# EAGLE board Co2 Emission_Gates (EAGLE 9.7.0)

Size 170.24 x 109.55 mm. Coordinates in mm from the lower left corner, seen from the top.
Outline: 0,0 170.24,0 170.24,109.55 0,109.55 0,0
Copper layers (1*16): Top 0.035mm / dielectric 1.5mm / Bottom 0.035mm
Design rules "default": minimum track width 6mil, minimum drill 0.35mm, track to track 6mil, track to pad 6mil, pad to pad 6mil, via to via 6mil, smd to smd 6mil, copper to edge 40mil, drill to drill 6mil, minimum pad ring 10mil, minimum via ring 8mil, stop-mask expansion 4mil, vias tented up to drill 0mil, thermal gap 10mil

## Footprints (pad centres in the part's own frame; a part is rotated, then mirrored left to right if it is on the bottom)
BATTERY-GENERIC = drill 1.118 pad 3.15 octagon: + 2.54,0; - -2.54,0
LEDRD254W60D565H860B = drill 0.981 pad 1.581: 1 -1.27,0; 2 1.27,0
LEDRD254W60D565H860B_Y = drill 0.981 pad 1.581: 1 -1.27,0; 2 1.27,0
LEDRD254W60D565H860B_G = drill 0.981 pad 1.581: 1 -1.27,0; 2 1.27,0
RESAD1016W63L850D250B = drill 0.83 pad 1.43: 1 -5.08,0; 2 5.08,0
SWITCH-SPDT-PTH-8.5X3.7MM = drill 1.016 pad 1.88: 1 -2.54,0; 2 0,0; 3 2.54,0
DIP762W53P254L1969H508Q14B = drill 0.743 pad 1.343: 1 -3.81,7.62; 2 -3.81,5.08; 3 -3.81,2.54; 4 -3.81,0; 5 -3.81,-2.54; 6 -3.81,-5.08; 7 -3.81,-7.62; 8 3.81,-7.62; 9 3.81,-5.08; 10 3.81,-2.54; 11 3.81,0; 12 3.81,2.54; 13 3.81,5.08; 14 3.81,7.62
TO220V = drill 1.016 long: 1 -2.54,-2.54; 2 0,-2.54; 3 2.54,-2.54

## Placement (x,y rotation side)
BAT1  9V  [BATTERY-GENERIC]  8.26,8.26 270 top
D1  RED  [LEDRD254W60D565H860B]  118.62,20.24 180 top
D2  YELLOW  [LEDRD254W60D565H860B_Y]  132.56,20.51 180 top
D3  GREEN  [LEDRD254W60D565H860B_G]  145.96,20.24 180 top
R1  100  [RESAD1016W63L850D250B]  117.25,10.12 90 top
R2  100  [RESAD1016W63L850D250B]  131.47,10.4 90 top
R3  100  [RESAD1016W63L850D250B]  144.87,10.12 90 top
R4  10k  [RESAD1016W63L850D250B]  40.73,95 90 top
R5  10k  [RESAD1016W63L850D250B]  55.94,95.23 90 top
R6  10k  [RESAD1016W63L850D250B]  68.78,94.42 90 top
R7  10k  [RESAD1016W63L850D250B]  81.28,94.75 90 top
R8  10k  [RESAD1016W63L850D250B]  124.74,95.23 90 top
R9  10k  [RESAD1016W63L850D250B]  137.38,95.23 90 top
R10  10k  [RESAD1016W63L850D250B]  150.25,94.53 90 top
R11  10k  [RESAD1016W63L850D250B]  160.31,94.76 90 top
R13  10k  [RESAD1016W63L850D250B]  96.89,94.76 90 top
S1  TOGGLE  [SWITCH-SPDT-PTH-8.5X3.7MM]  43.5,102.57 0 top
S2  TOGGLE  [SWITCH-SPDT-PTH-8.5X3.7MM]  58.6,102.44 0 top
S3  TOGGLE  [SWITCH-SPDT-PTH-8.5X3.7MM]  71.32,102.3 0 top
S4  TOGGLE  [SWITCH-SPDT-PTH-8.5X3.7MM]  83.82,102.17 0 top
S5  TOGGLE  [SWITCH-SPDT-PTH-8.5X3.7MM]  99.34,102.04 0 top
S6  TOGGLE  [SWITCH-SPDT-PTH-8.5X3.7MM]  127.5,102.54 0 top
S7  TOGGLE  [SWITCH-SPDT-PTH-8.5X3.7MM]  139.79,102.41 0 top
S8  TOGGLE  [SWITCH-SPDT-PTH-8.5X3.7MM]  152.71,101.99 0 top
S9  TOGGLE  [SWITCH-SPDT-PTH-8.5X3.7MM]  162.82,101.99 0 top
U1  74HC08_PDIP  [DIP762W53P254L1969H508Q14B]  58.66,59.1 90 top
U2  74HC08_PDIP  [DIP762W53P254L1969H508Q14B]  91.68,59.1 90 top
U4  74HC32_PDIP  [DIP762W53P254L1969H508Q14B]  139.94,59.1 90 top
U9  LM7805_TO220V  [TO220V]  16.06,33.68 0 top

## Library data of the parts
BAT1 R1-R11 R13 S1-S9 U1 U2 U4 U9 = Tinkercad
D1 = Tinkercad; CATEGORY: Opto-Electronic; SUB-CATEGORY: LED; VALUE: LED_RED
D2 = Tinkercad; CATEGORY: Opto-Electronic; SUB-CATEGORY: LED; VALUE: LED_YELLOW
D3 = Tinkercad; CATEGORY: Opto-Electronic; SUB-CATEGORY: LED; VALUE: LED_GREEN

## Nets
BAT1+: BAT1.+ U9.1
BAT1-: BAT1.- R1.1 R2.1 R3.1 R4.1 R5.1 R6.1 R7.1 R8.1 R9.1 R10.1 R11.1 R13.1 U1.7 U2.7 U4.7 U9.2
D1_C: D1.2 R1.2
D2_C: D2.2 R2.2
D3_C: D3.2 R3.2
S1_O: R4.2 S1.1
S2_O: R5.2 S2.1
S3_O: R6.2 S3.1
S4_O: R7.2 S4.1
S5_O: R13.2 S5.1
S6_O: R8.2 S6.1
S7_O: R9.2 S7.1
S8_O: R10.2 S8.1
S9_O: R11.2 S9.1
U1_1A: S1.2 U1.1
U1_1B: S8.2 U1.2 U1.13
U1_1Y: U1.3 U4.1
U1_2A: S2.2 U1.4
U1_2B: S9.2 U1.5 U2.2
U1_2Y: U1.6 U4.2
U1_3A: S3.2 U1.9
U1_3B: S7.2 U1.10 U2.5
U1_3Y: U1.8 U4.4
U1_4A: S4.2 U1.12
U1_4Y: U1.11 U4.5
U2_1A: S5.2 U2.1
U2_1Y: U2.3 U4.9
U2_2A: S6.2 U2.4
U2_2Y: U2.6 U4.10
U2_VCC: S1.3 S2.3 S3.3 S4.3 S5.3 S6.3 S7.3 S8.3 S9.3 U1.14 U2.14 U4.14 U9.3
U4_1Y: D3.1 U4.3
U4_2Y: D2.1 U4.6
U4_3Y: D1.1 U4.8

## Tracks (layer width: path | path; a pad name or v marks a point on that pad's centre or on a via)
BAT1+  (1 unrouted)
BAT1-  (16 unrouted)
D1_C  (1 unrouted)
D2_C  (1 unrouted)
D3_C  (1 unrouted)
S1_O  (1 unrouted)
S2_O  (1 unrouted)
S3_O  (1 unrouted)
S4_O  (1 unrouted)
S5_O  (1 unrouted)
S6_O  (1 unrouted)
S7_O  (1 unrouted)
S8_O  (1 unrouted)
S9_O  (1 unrouted)
U1_1A  (1 unrouted)
U1_1B  (2 unrouted)
U1_1Y  (1 unrouted)
U1_2A  (1 unrouted)
U1_2B  (2 unrouted)
U1_2Y  (1 unrouted)
U1_3A  (1 unrouted)
U1_3B  (2 unrouted)
U1_3Y  (1 unrouted)
U1_4A  (1 unrouted)
U1_4Y  (1 unrouted)
U2_1A  (1 unrouted)
U2_1Y  (1 unrouted)
U2_2A  (1 unrouted)
U2_2Y  (1 unrouted)
U2_VCC  (12 unrouted)
U4_1Y  (1 unrouted)
U4_2Y  (1 unrouted)
U4_3Y  (1 unrouted)